# EAGLE board battery-breakout (EAGLE 5.11)
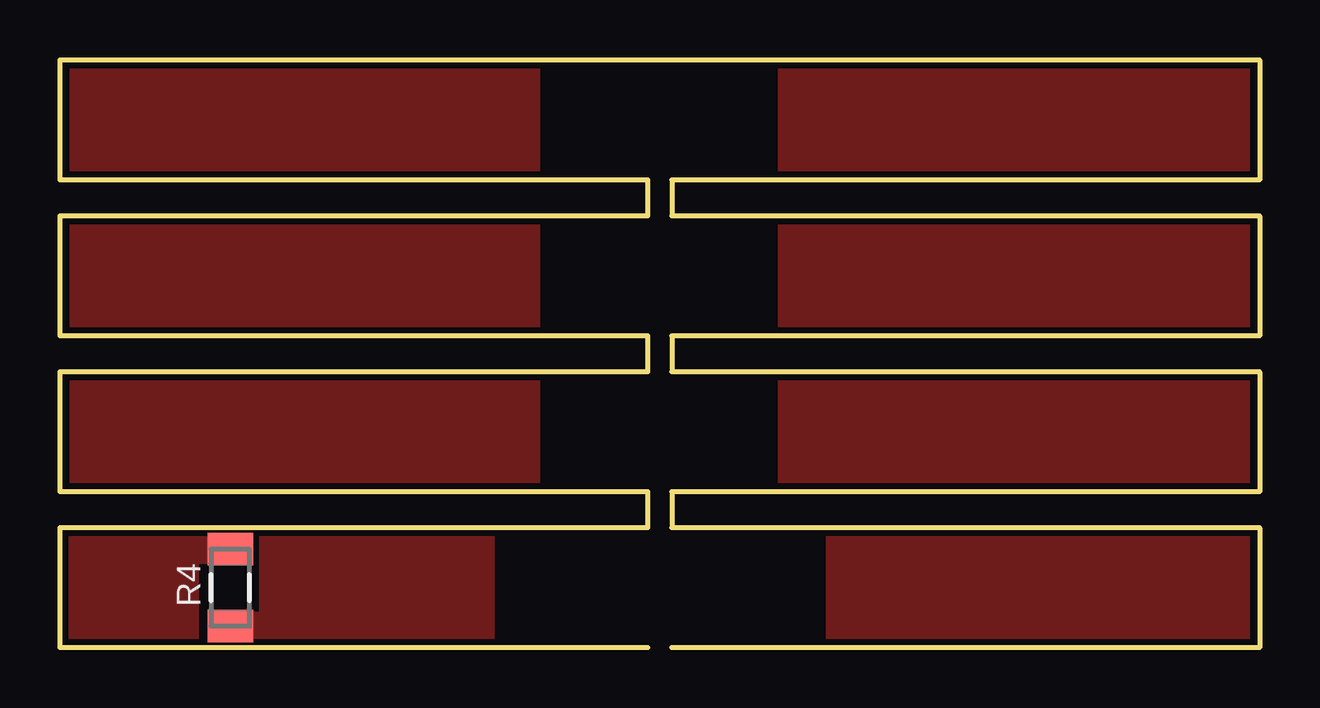
[diagram p0: board, top side]

Size 50 x 24.5 mm. Coordinates in mm from the lower left corner, seen from the top.
Outline: 25.5,0 50,0 50,5 25.5,5 25.5,6.5 50,6.5 50,11.5 25.5,11.5 25.5,13 50,13 50,18 25.5,18 25.5,19.5 50,19.5 50,24.5 0,24.5 0,19.5 24.5,19.5 24.5,18 0,18 0,13 24.5,13 24.5,11.5 0,11.5 0,6.5 24.5,6.5 24.5,5 0,5 0,0 24.5,0
Copper layers (1*16): Top 0.035mm / dielectric 1.5mm / Bottom 0.035mm
Design rules "default *": minimum track width 10mil, minimum drill 24mil, track to track 8mil, track to pad 8mil, pad to pad 8mil, via to via 8mil, smd to smd 8mil, copper to edge 10mil, drill to drill 8mil, minimum pad ring 10mil, minimum via ring 8mil, stop-mask expansion 4mil, vias tented up to drill 0mil, thermal gap 10mil

## Footprints (pad centres in the part's own frame; a part is rotated, then mirrored left to right if it is on the bottom)
1206-A = smd 1.35 x 1.9: 1 -1.6,0; 2 1.6,0

## Placement (x,y rotation side)
R1  [1206-A]  -5.9,-3.3 0 top  (outside the outline)
R2  [1206-A]  -6.3,-7.6 0 top  (outside the outline)
R3  [1206-A]  -6.7,-11.9 0 top  (outside the outline)
R4  [1206-A]  7.1,2.5 90 top

## Library data of the parts
R1-R4 = rcl_custom

## Nets
B1+: R1.1
B1-FUSED: R1.2
B2+: R2.1
B2-FUSED: R2.2
B3+: R3.1
B3-FUSED: R3.2
B4+: R4.1
B4-FUSED: R4.2

## Tracks (layer width: path | path; a pad name or v marks a point on that pad's centre or on a via)
B1+
  pour Top (rank 3, no thermals): 0.5,24.5 19.9,24.5 19.9,19.5 0.5,19.5
B2+
  pour Top (rank 3, no thermals): 0.5,18 19.9,18 19.9,13 0.5,13
B3+
  pour Top (rank 3, no thermals): 0.5,11.5 19.9,11.5 19.9,6.5 0.5,6.5
B4+
  pour Top (isolate 0.25, rank 3, no thermals): 8.4,5 18,5 18,0 7,0 7,1.4 8.4,1.4
B4-FUSED
  pour Top (isolate 0.25, no thermals): 7.1,3.6 7.1,5 0,5 0,0 5.7,0 5.7,3.6
S$2
  pour Top (rank 3, no thermals): 49.5,5 32,5 32,0 49.5,0
S$4
  pour Top (rank 3, no thermals): 49.5,11.5 30,11.5 30,6.5 49.5,6.5
S$6
  pour Top (rank 3, no thermals): 49.5,18 30,18 30,13 49.5,13
S$8
  pour Top (rank 3, no thermals): 49.5,24.5 30,24.5 30,19.5 49.5,19.5